# EAGLE board RgbwLedDriver (EAGLE 6.6.0)
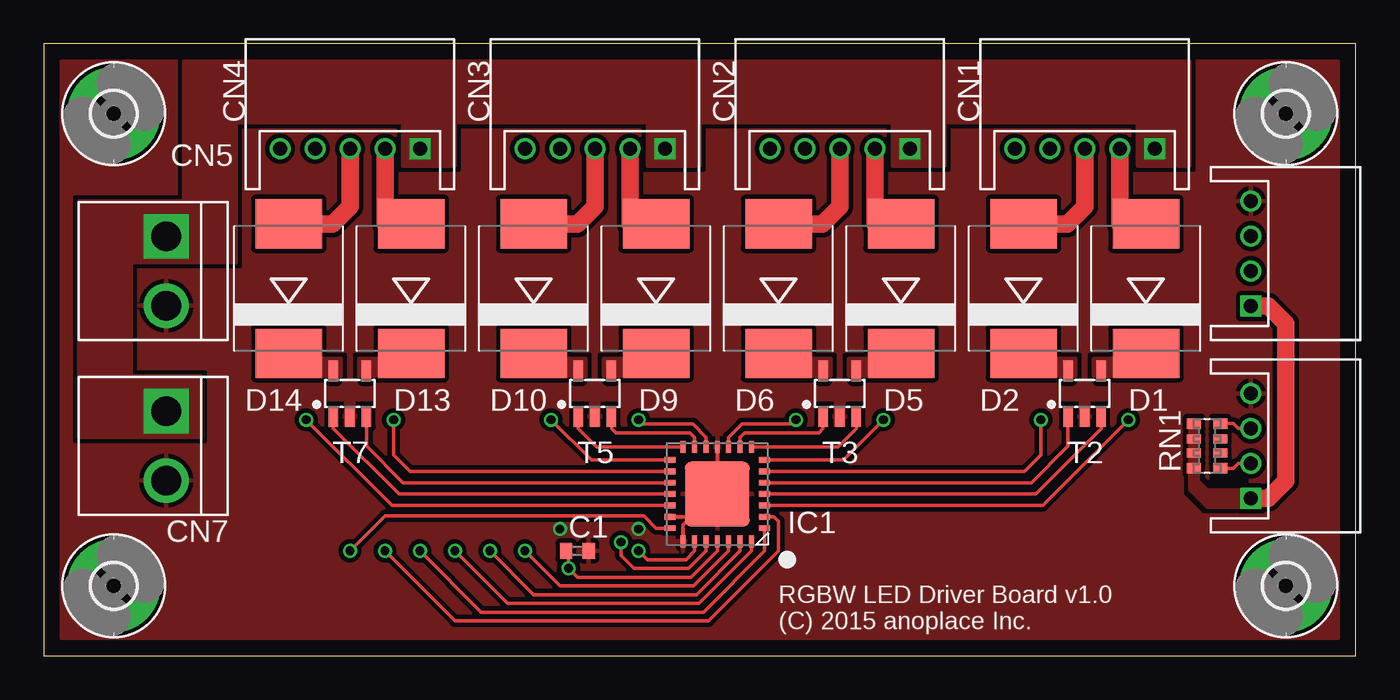
[diagram p0: board, top side]
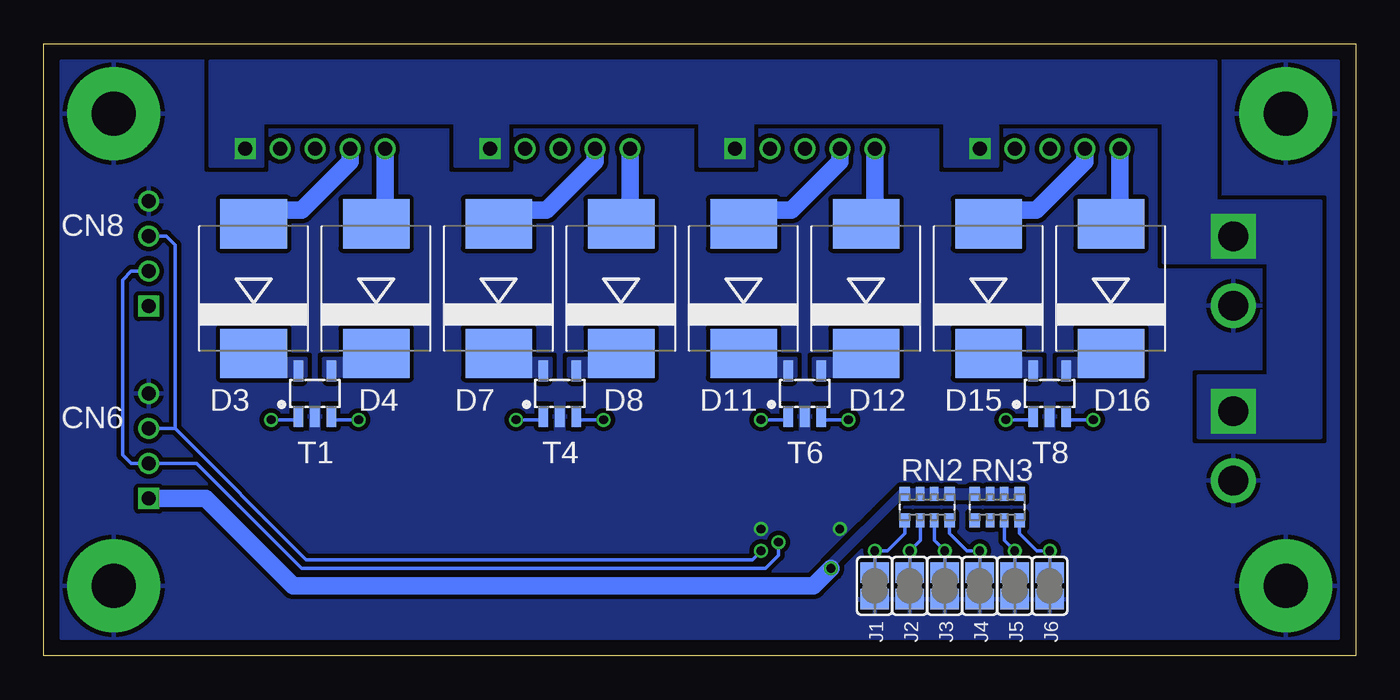
[diagram p1: board, bottom side, seen from below]

Size 75 x 35 mm. Coordinates in mm from the lower left corner, seen from the top.
Outline: 0,0 75,0 75,35 0,35 0,0
Copper layers (1+2*15+16): Top 0.018mm / dielectric 0.25mm / Route2 0.035mm / dielectric 1mm / Route15 0.035mm / dielectric 0.25mm / Bottom 0.018mm
Design rules "pban_5mil-l4": minimum track width 5mil, minimum drill 0.3mm, track to track 5mil, track to pad 0.229mm, pad to pad 5mil, via to via 5mil, smd to smd 5mil, copper to edge 0.5mm, drill to drill 0.5mm, minimum pad ring 0.15mm, minimum via ring 0.15mm, stop-mask expansion 4mil, vias tented up to drill 0.35mm, thermal gap 10mil
tRestrict: area 67,9.8 to 68.5,10.2; area 17,12 to 18,13; area 31,12.2 to 32,13; area 45,12.2 to 46,13; area 59,12.2 to 60,13; area 34.5,7.8 to 35.2,8.2

## Footprints (pad centres in the part's own frame; a part is rotated, then mirrored left to right if it is on the bottom)
C0402 = smd 0.7 x 0.9: 1 -0.65,0; 2 0.65,0
S5B-PH-K-S = drill 0.8 square: 1 4,0 | drill 0.8: 2 2,0; 3 0,0; 4 -2,0; 5 -4,0
B2P-VH = drill 1.7 square: 1 -1.98,0 | drill 1.7: 2 1.98,0
S4B-PH-K-S = drill 0.8 square: 1 3,0 | drill 0.8: 2 1,0; 3 -1,0; 4 -3,0
SMC = smd 2.8 x 3.8: A 3.7,0; C -3.7,0
2,5-PAD = drill 2.5 pad 5.334: B2,5 0,0
QFN28-ML_6X6MM = smd 0.7 x 0.35: 1 -2.7,1.95; 2 -2.7,1.3; 3 -2.7,0.65; 4 -2.7,0; 5 -2.7,-0.65; 6 -2.7,-1.3; 7 -2.7,-1.95; 15 2.7,-1.95; 16 2.7,-1.3; 17 2.7,-0.65; 18 2.7,0; 19 2.7,0.65; 20 2.7,1.3; 21 2.7,1.95 | smd 0.35 x 0.7: 8 -1.95,-2.7; 9 -1.3,-2.7; 10 -0.65,-2.7; 11 0,-2.7; 12 0.65,-2.7; 13 1.3,-2.7; 14 1.95,-2.7; 22 1.95,2.7; 23 1.3,2.7; 24 0.65,2.7; 25 0,2.7; 26 -0.65,2.7; 27 -1.3,2.7; 28 -1.95,2.7 | smd 3.7 x 3.7: EXP 0,0
SJ = smd 1.168 x 1.6: 1 -0.762,0; 2 0.762,0
EXB38V = smd 0.6 x 0.8: 1 -1.275,-0.75; 4 1.275,-0.75; 5 1.275,0.75; 8 -1.275,0.75 | smd 0.5 x 0.8: 2 -0.4,-0.75; 3 0.4,-0.75; 6 0.4,0.75; 7 -0.4,0.75
SOT23-5L = smd 0.55 x 1.2: 1 -0.95,-1.3; 2 0,-1.3; 3 0.95,-1.3; 4 0.95,1.3; 5 -0.95,1.3

## Placement (x,y rotation side)
C1  0.1uF  [C0402]  30.5,6 0 top
CN1  LED1  [S5B-PH-K-S]  59.5,29 0 top
CN2  LED2  [S5B-PH-K-S]  45.5,29 0 top
CN3  LED3  [S5B-PH-K-S]  31.5,29 0 top
CN4  LED4  [S5B-PH-K-S]  17.5,29 0 top
CN5  POWER  [B2P-VH]  7,22 270 top
CN6  I2C  [S4B-PH-K-S]  69,12 270 top
CN7  POWER  [B2P-VH]  7,12 270 top
CN8  I2C  [S4B-PH-K-S]  69,23 270 top
D1  NSI50350AST3G  [SMC]  63,21 90 top
D2  NSI50350AST3G  [SMC]  56,21 90 top
D3  NSI50350AST3G  [SMC]  63,21 90 bottom
D4  NSI50350AST3G  [SMC]  56,21 90 bottom
D5  NSI50350AST3G  [SMC]  49,21 90 top
D6  NSI50350AST3G  [SMC]  42,21 90 top
D7  NSI50350AST3G  [SMC]  49,21 90 bottom
D8  NSI50350AST3G  [SMC]  42,21 90 bottom
D9  NSI50350AST3G  [SMC]  35,21 90 top
D10  NSI50350AST3G  [SMC]  28,21 90 top
D11  NSI50350AST3G  [SMC]  35,21 90 bottom
D12  NSI50350AST3G  [SMC]  28,21 90 bottom
D13  NSI50350AST3G  [SMC]  21,21 90 top
D14  NSI50350AST3G  [SMC]  14,21 90 top
D15  NSI50350AST3G  [SMC]  21,21 90 bottom
D16  NSI50350AST3G  [SMC]  14,21 90 bottom
H1  MOUNT-PAD-ROUND2.5  [2,5-PAD]  4,31 0 top
H2  MOUNT-PAD-ROUND2.5  [2,5-PAD]  4,4 0 top
H3  MOUNT-PAD-ROUND2.5  [2,5-PAD]  71,4 0 top
H4  MOUNT-PAD-ROUND2.5  [2,5-PAD]  71,31 0 top
IC1  PCA9685BS  [QFN28-ML_6X6MM]  38.5,9.25 180 top
J1  A0  [SJ]  27.5,4 90 bottom
J2  A1  [SJ]  25.5,4 90 bottom
J3  A2  [SJ]  23.5,4 90 bottom
J4  A3  [SJ]  21.5,4 90 bottom
J5  A4  [SJ]  19.5,4 90 bottom
J6  A5  [SJ]  17.5,4 90 bottom
RN1  10k  [EXB38V]  66.5,12 90 top
RN2  10k  [EXB38V]  24.5,8.5 0 bottom
RN3  10k  [EXB38V]  20.5,8.5 0 bottom
T1  QS5K2  [SOT23-5L]  59.5,15 0 bottom
T2  QS5K2  [SOT23-5L]  59.5,15 0 top
T3  QS5K2  [SOT23-5L]  45.5,15 0 top
T4  QS5K2  [SOT23-5L]  45.5,15 0 bottom
T5  QS5K2  [SOT23-5L]  31.5,15 0 top
T6  QS5K2  [SOT23-5L]  31.5,15 0 bottom
T7  QS5K2  [SOT23-5L]  17.5,15 0 top
T8  QS5K2  [SOT23-5L]  17.5,15 0 bottom

## Library data of the parts
C1 = resistor
CN1-CN4 CN6 CN8 = jst-ph
CN5 CN7 = jst-vh
D1-D16 = on-semiconductor
H1-H4 = holes
IC1 = nxp
J1-J6 = jumper
RN1-RN3 = resistor-dil; OC_FARNELL: unknown; OC_NEWARK: unknown
T1-T8 = rohm

## Nets
+3V: C1.1 CN6.1 CN8.1 IC1.25 RN1.5 RN1.6 RN1.7 RN1.8 RN2.5 RN2.6 RN2.7 RN2.8 RN3.5 RN3.6 RN3.7 RN3.8
+7.2V: CN1.1 CN2.1 CN3.1 CN4.1 CN5.1 CN7.1
GND: C1.2 CN5.2 CN6.4 CN7.2 CN8.4 H1.B2,5 H2.B2,5 H3.B2,5 H4.B2,5 IC1.11 IC1.20 IC1.22 IC1.EXP J1.1 J2.1 J3.1 J4.1 J5.1 J6.1 T1.2 T2.2 T3.2 T4.2 T5.2 T6.2 T7.2 T8.2
I2C_SCL: CN6.3 CN8.3 IC1.23 RN1.4
I2C_SDA: CN6.2 CN8.2 IC1.24 RN1.1
LED0_BLUE: IC1.3 T1.1
LED0_GREEN: IC1.5 T2.1
LED0_RED: IC1.4 T2.3
LED0_WHITE: IC1.6 T1.3
LED1_BLUE: IC1.7 T4.1
LED1_GREEN: IC1.9 T3.1
LED1_RED: IC1.8 T3.3
LED1_WHITE: IC1.10 T4.3
LED2_BLUE: IC1.12 T6.1
LED2_GREEN: IC1.14 T5.1
LED2_RED: IC1.13 T5.3
LED2_WHITE: IC1.15 T6.3
LED3_BLUE: IC1.16 T8.1
LED3_GREEN: IC1.18 T7.1
LED3_RED: IC1.17 T7.3
LED3_WHITE: IC1.19 T8.3
N$1: CN1.2 D1.A
N$2: D2.C T2.5
N$3: D6.C T3.5
N$4: D1.C T2.4
N$5: D4.C T1.4
N$6: CN1.3 D2.A
N$7: CN1.5 D4.A
N$8: CN1.4 D3.A
N$9: D3.C T1.5
N$10: D5.C T3.4
N$11: D8.C T4.4
N$12: CN2.2 D5.A
N$13: CN2.3 D6.A
N$14: CN2.5 D8.A
N$15: CN2.4 D7.A
N$16: D7.C T4.5
N$17: D10.C T5.5
N$18: D9.C T5.4
N$19: D12.C T6.4
N$20: CN3.2 D9.A
N$21: CN3.3 D10.A
N$22: CN3.5 D12.A
N$23: CN3.4 D11.A
N$24: D11.C T6.5
N$25: D14.C T7.5
N$26: D13.C T7.4
N$27: D16.C T8.4
N$28: CN4.2 D13.A
N$29: CN4.3 D14.A
N$30: CN4.5 D16.A
N$31: CN4.4 D15.A
N$32: D15.C T8.5
N$33: IC1.26 J1.2 RN2.1
N$34: IC1.27 J2.2 RN2.2
N$35: IC1.28 J3.2 RN2.3
N$36: IC1.1 J4.2 RN2.4
N$37: IC1.2 J5.2 RN3.3
N$38: IC1.21 J6.2 RN3.4

## Tracks (layer width: path | path; a pad name or v marks a point on that pad's centre or on a via)
+3V  (via drill 0.5)
  Top 0.2: IC1.25 38.5,6 37,4.5 30.5,4.5 v30,5 30,6 C1.1
  Top 1: CN8.1 70,20 71,19 71,10 70,9 CN6.1
  Bottom 1: CN6.1 65.75,9 60.75,4 31,4 v30,5
  pour Top (no thermals): 66.5,9.5 66,10 66,13.5 65.5,13.5 65.5,9.5 66.5,8.5 69.5,8.5 69.5,9.5
  pour Bottom (no thermals): 26,9.5 19,9.5 19,9 26,9 29.75,5.25 29.75,4.75 30.25,4.75 30.25,5.25
+7.2V
  pour Bottom (no thermals): 20.5,28 20.5,30.5 11,30.5 11,22.5 5,22.5 5,16 9,16 9,12.5 2,12.5 2,26 8,26 8,34 65.5,34 65.5,28 62.5,28 62.5,30.5 51.5,30.5 51.5,28 48.5,28 48.5,30.5 37.5,30.5 37.5,28 34.5,28 34.5,30.5 23.5,30.5 23.5,28
  pour Top (no thermals): 20.5,28 20.5,30.5 11,30.5 11,22.5 5,22.5 5,16 9,16 9,12.5 2,12.5 2,26 8,26 8,34 65.5,34 65.5,28 62.5,28 62.5,30.5 51.5,30.5 51.5,28 48.5,28 48.5,30.5 37.5,30.5 37.5,28 34.5,28 34.5,30.5 23.5,30.5 23.5,28
GND  (via drill 0.5)
  Top 0.2: IC1.22 36.55,7.5 37,7.95 | IC1.11 IC1.EXP | IC1.20 37,7.95 | 37,7.95 38,7.95 38,8
  other vias: 34,7.25 29.5,7.25
  pour Top (isolate 0.254, rank 6): 1,34 74,34 74,1 1,1
  pour Bottom (isolate 0.254, rank 6): 1,34 74,34 74,1 1,1
  pour Bottom (no thermals): 17.75,12.5 17.75,15 17.25,15 17.25,12.5
  pour Bottom (no thermals): 31.75,12.5 31.75,15 31.25,15 31.25,12.5
  pour Bottom (no thermals): 45.75,12.5 45.75,15 45.25,15 45.25,12.5
  pour Bottom (no thermals): 59.75,12.5 59.75,15 59.25,15 59.25,12.5
  pour Top (no thermals): 17.75,12.5 17.75,15 17.25,15 17.25,12.5
  pour Top (no thermals): 31.75,12.5 31.75,15 31.25,15 31.25,12.5
  pour Top (no thermals): 45.75,12.5 45.75,15 45.25,15 45.25,12.5
  pour Top (no thermals): 59.75,12.5 59.75,15 59.25,15 59.25,12.5
I2C_SCL  (via drill 0.5)
  Top 0.2: v34,6 34.5,5.5 36.7,5.5 37.2,6 IC1.23 | RN1.4 68,13.28 68.28,13 CN6.3
  Bottom 0.2: v34,6 34.5,5.5 60,5.5 67.5,13 | CN8.3 68,24 67.5,23.5 67.5,13 | 67.5,13 CN6.3
I2C_SDA  (via drill 0.5)
  Top 0.2: IC1.24 37.85,6 36.85,5 33.75,5 33,5.75 v33,6.5 | RN1.1 68,10.72 68.28,11 CN6.2
  Bottom 0.2: v33,6.5 33,5.75 33.75,5 60.25,5 66.25,11 CN6.2 70,11 70.5,11.5 70.5,21.5 70,22 CN8.2
LED0_BLUE  (via drill 0.5)
  Top 0.2: IC1.3 57.1,8.6 v62,13.5
  Bottom 0.2: T1.1 60.45,13.5 v62,13.5
LED0_GREEN
  Top 0.2: IC1.5 56.45,9.9 58.55,12 T2.1
LED0_RED
  Top 0.2: IC1.4 56.7,9.25 60.45,13 T2.3
LED0_WHITE  (via drill 0.5)
  Top 0.2: IC1.6 56.05,10.55 57,11.5 v57,13.5
  Bottom 0.2: T1.3 58.55,13.5 v57,13.5
LED1_BLUE  (via drill 0.5)
  Top 0.2: 41.2,11.25 IC1.7 45.7,11.2 v48,13.5
  Bottom 0.2: T4.1 46.45,13.5 v48,13.5
LED1_GREEN
  Top 0.2: T3.1 44.55,13 44.3,12.75 40.05,12.75 39.8,12.5 IC1.9
LED1_RED
  Top 0.2: T3.3 46.45,13 45.4,11.95 IC1.8
LED1_WHITE  (via drill 0.5)
  Top 0.2: v43,13.5 42.75,13.25 39.9,13.25 39.15,12.5 IC1.10
  Bottom 0.2: T4.3 44.55,13.5 v43,13.5
LED2_BLUE  (via drill 0.5)
  Top 0.2: v34,13.5 34.25,13.25 37.1,13.25 37.85,12.5 IC1.12
  Bottom 0.2: T6.1 32.45,13.5 v34,13.5
LED2_GREEN
  Top 0.2: 36.55,12 IC1.14 31.6,11.95 30.55,13 T5.1
LED2_RED
  Top 0.2: T5.3 32.45,13 32.7,12.75 36.95,12.75 37.2,12.5 IC1.13
LED2_WHITE  (via drill 0.5)
  Top 0.2: 35.8,11.25 IC1.15 31.3,11.2 v29,13.5
  Bottom 0.2: T6.3 30.55,13.5 v29,13.5
LED3_BLUE  (via drill 0.5)
  Top 0.2: IC1.16 20.95,10.55 20,11.5 v20,13.5
  Bottom 0.2: T8.1 18.45,13.5 v20,13.5
LED3_GREEN
  Top 0.2: IC1.18 20.3,9.25 16.55,13 T7.1
LED3_RED
  Top 0.2: IC1.17 20.55,9.9 18.45,12 T7.3
LED3_WHITE  (via drill 0.5)
  Top 0.2: IC1.19 19.9,8.6 v15,13.5
  Bottom 0.2: T8.3 16.55,13.5 v15,13.5
N$1
  Top 1: D1.A 61.5,24.7 CN1.2
N$2
  pour Top (no thermals): 55,18 55,16 59,16 59,17 57,17 57,18
N$3
  pour Top (no thermals): 41,18 41,16 45,16 45,17 43,17 43,18
N$4
  pour Top (no thermals): 60,17 60,16 64,16 64,18 62,18 62,17
N$5
  pour Bottom (no thermals): 55,18 55,16 59,16 59,17 57,17 57,18
N$6
  Top 1: D2.A 58.5,24.7 59.5,25.7 CN1.3
N$7
  Bottom 1: D4.A 55.5,24.7 CN1.5
N$8
  Bottom 1: D3.A 63,25.5 60.25,25.5 57.5,28.25 CN1.4
N$9
  pour Bottom (no thermals): 60,17 60,16 64,16 64,18 62,18 62,17
N$10
  pour Top (no thermals): 46,17 46,16 50,16 50,18 48,18 48,17
N$11
  pour Bottom (no thermals): 43,17 43,18 41,18 41,16 45,16 45,17
N$12
  Top 1: D5.A 47.5,24.7 CN2.2
N$13
  Top 1: D6.A 44.5,24.7 45.5,25.7 CN2.3
N$14
  Bottom 1: D8.A 41.5,24.7 CN2.5
N$15
  Bottom 1: D7.A 49,25.5 46.25,25.5 43.5,28.25 CN2.4
N$16
  pour Bottom (no thermals): 46,17 46,16 50,16 50,18 48,18 48,17
N$17
  pour Top (no thermals): 29,18 27,18 27,16 31,16 31,17 29,17
N$18
  pour Top (no thermals): 32,17 32,16 36,16 36,18 34,18 34,17
N$19
  pour Bottom (no thermals): 31,17 29,17 29,18 27,18 27,16 31,16
N$20
  Top 1: D9.A 33.5,24.7 CN3.2
N$21
  Top 1: D10.A 30.5,24.7 31.5,25.7 CN3.3
N$22
  Bottom 1: D12.A 27.5,24.7 CN3.5
N$23
  Bottom 1: D11.A 35,25.5 32.25,25.5 29.5,28.25 CN3.4
N$24
  pour Bottom (no thermals): 32,17 32,16 36,16 36,18 34,18 34,17
N$25
  pour Top (no thermals): 13,18 13,16 17,16 17,17 15,17 15,18
N$26
  pour Top (no thermals): 18,17 18,16 22,16 22,18 20,18 20,17
N$27
  pour Bottom (no thermals): 15,17 15,18 13,18 13,16 17,16 17,17
N$28
  Top 1: D13.A 19.5,24.7 CN4.2
N$29
  Top 1: D14.A 16.5,24.7 17.5,25.7 CN4.3
N$30
  Bottom 1: D16.A 13.5,24.7 CN4.5
N$31
  Bottom 1: D15.A 21,25.5 18.25,25.5 15.5,28.25 CN4.4
N$32
  pour Bottom (no thermals): 18,17 18,16 22,16 22,18 20,18 20,17
N$33  (via drill 0.5)
  Top 0.2: IC1.26 39.15,6 37.15,4 29.5,4 v27.5,6
  Bottom 0.2: RN2.1 25.77,7 26.77,6 v27.5,6 J1.2
N$34  (via drill 0.5)
  Top 0.2: IC1.27 39.8,6 37.3,3.5 28,3.5 v25.5,6
  Bottom 0.2: J2.2 v25.5,6 24.9,6.6 RN2.2
N$35  (via drill 0.5)
  Top 0.2: IC1.28 40.45,6 37.45,3 26.5,3 v23.5,6
  Bottom 0.2: J3.2 v23.5,6 24.1,6.6 RN2.3
N$36  (via drill 0.5)
  Top 0.2: IC1.1 41.2,6 37.7,2.5 25,2.5 v21.5,6
  Bottom 0.2: J4.2 v21.5,6 22.23,6 23.23,7 RN2.4
N$37  (via drill 0.5)
  Top 0.2: IC1.2 41.75,7.95 42,7.7 42,6 38,2 23.5,2 v19.5,6
  Bottom 0.2: J5.2 v19.5,6 20.1,6.6 RN3.3
N$38  (via drill 0.5)
  Top 0.2: IC1.21 35,7.3 34.3,8 19.5,8 v17.5,6
  Bottom 0.2: J6.2 v17.5,6 18.23,6 19.23,7 RN3.4

## Text on the board
tNames: RGBW LED Driver Board v1.0 | (C) 2015 anoplace Inc.